# EAGLE board electronic_eye2 (EAGLE 6.5.0)
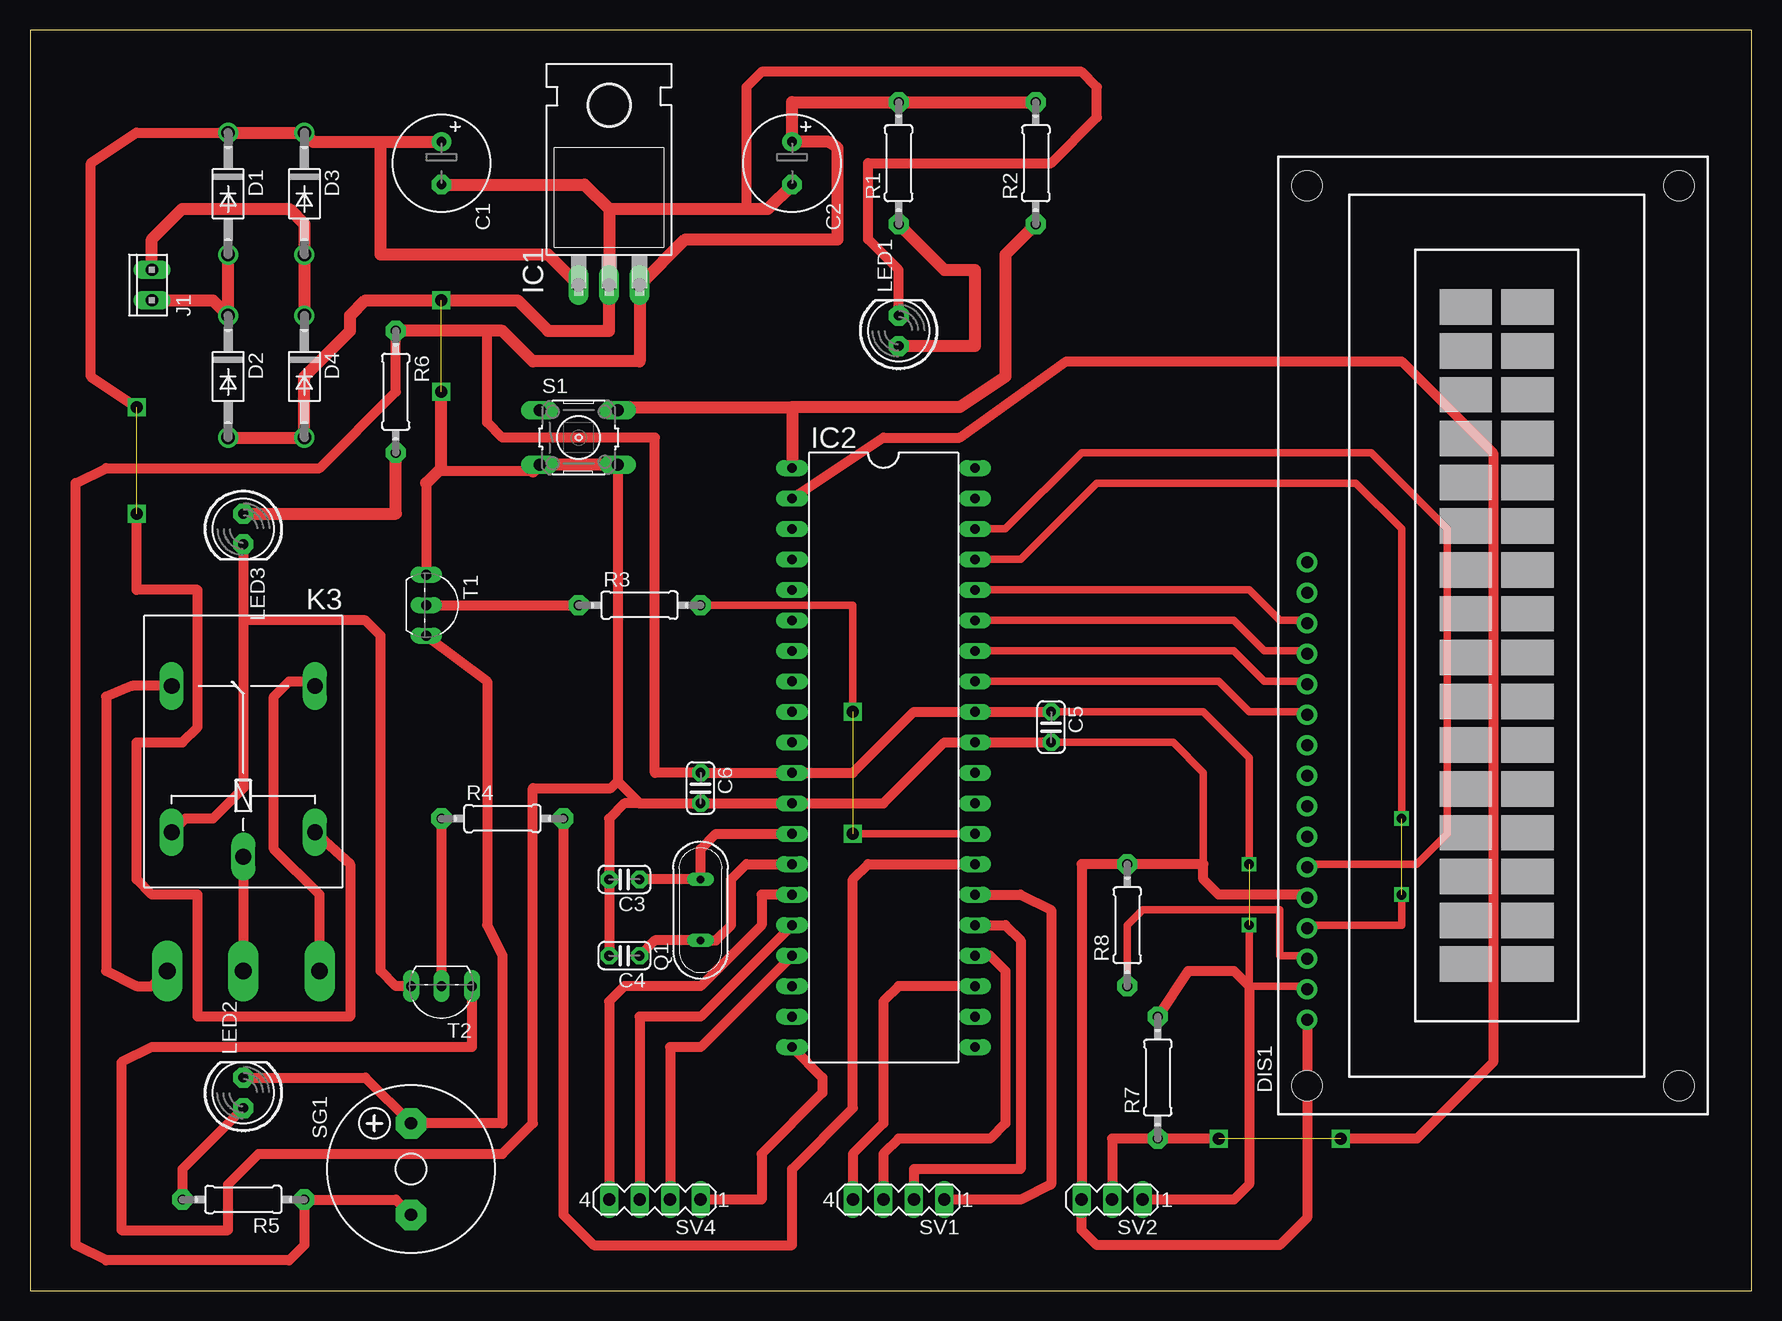
[diagram p0: board, top side]

Size 143.49 x 105.08 mm. Coordinates in mm from the lower left corner, seen from the top.
Outline: 0,0 143.49,0 143.49,105.08 0,105.08 0,0
Copper layers (1*16): Top 0.035mm / dielectric 1.5mm / Bottom 0.035mm
Design rules "default": minimum track width 10mil, minimum drill 24mil, track to track 8mil, track to pad 8mil, pad to pad 8mil, via to via 8mil, smd to smd 8mil, copper to edge 40mil, drill to drill 8mil, minimum pad ring 10mil, minimum via ring 8mil, stop-mask expansion 4mil, vias tented up to drill 0mil, thermal gap 10mil

## Footprints (pad centres in the part's own frame; a part is rotated, then mirrored left to right if it is on the bottom)
E3,5-8 = drill 0.813 pad 1.6: + -1.778,0 | drill 0.813 pad 1.6 octagon: - 1.778,0
C025-024X044 = drill 0.813 pad 1.422 octagon: 1 -1.27,0; 2 1.27,0
DO41-10 = drill 1.118: A 5.08,0; C -5.08,0
TUXGR_16X2_R2 = drill 1 pad 1.676: 1 -32,15.5; 2 -29.46,15.5; 3 -26.92,15.5; 4 -24.38,15.5; 5 -21.84,15.5; 6 -19.3,15.5; 7 -16.76,15.5; 8 -14.22,15.5; 9 -11.68,15.5; 10 -9.14,15.5; 11 -6.6,15.5; 12 -4.06,15.5; 13 -1.52,15.5; 14 1.02,15.5; 15 3.56,15.5; 16 6.1,15.5 | hole 2.5: -37.5,-15.5; 37.5,-15.5; -37.5,15.5; 37.5,15.5
TO220H = drill 1.118 long: 1 -2.54,-10.16; 2 0,-10.16; 3 2.54,-10.16 | hole 3.302: 0,4.826
DIL40 = drill 0.813 long: 1 -24.13,-7.62; 2 -21.59,-7.62; 3 -19.05,-7.62; 4 -16.51,-7.62; 5 -13.97,-7.62; 6 -11.43,-7.62; 7 -8.89,-7.62; 8 -6.35,-7.62; 9 -3.81,-7.62; 10 -1.27,-7.62; 11 1.27,-7.62; 12 3.81,-7.62; 13 6.35,-7.62; 14 8.89,-7.62; 15 11.43,-7.62; 16 13.97,-7.62; 17 16.51,-7.62; 18 19.05,-7.62; 19 21.59,-7.62; 20 24.13,-7.62; 21 24.13,7.62; 22 21.59,7.62; 23 19.05,7.62; 24 16.51,7.62; 25 13.97,7.62; 26 11.43,7.62; 27 8.89,7.62; 28 6.35,7.62; 29 3.81,7.62; 30 1.27,7.62; 31 -1.27,7.62; 32 -3.81,7.62; 33 -6.35,7.62; 34 -8.89,7.62; 35 -11.43,7.62; 36 -13.97,7.62; 37 -16.51,7.62; 38 -19.05,7.62; 39 -21.59,7.62; 40 -24.13,7.62
10X02MTA = drill 1.016 long: 1 1.27,0; 2 -1.27,0
1X1-BIGPOGO = drill 1.4 pad 2.54 long: P$1 0,0
G5LE = drill 1.321 long: 1 -7.493,-5.969; 2 -7.493,5.969; O 4.699,5.969; P -9.525,0; S 4.699,-5.969
LED5MM = drill 0.813 pad 1.676 octagon: A -1.27,0; K 1.27,0
QS = drill 0.61 long: 1 -2.54,0; 2 2.54,0
0207/10 = drill 0.813 pad 1.676 octagon: 1 -5.08,0; 2 5.08,0
B3F-10XX = drill 1.016 long: 1 -3.251,2.261; 2 3.251,2.261; 3 -3.251,-2.261; 4 3.251,-2.261
F/CM12P = drill 1.016 pad 2.54 octagon: + 3.81,0; - -3.81,0
MA04-1 = drill 1.016 long: 1 -3.81,0; 2 -1.27,0; 3 1.27,0; 4 3.81,0
MA03-1 = drill 1.016 long: 1 -2.54,0; 2 0,0; 3 2.54,0
TO92-EBC-OVAL = drill 0.813 long: B 0,-1.27; C 2.54,-1.27; E -2.54,-1.27

## Placement (x,y rotation side)
C1  [E3,5-8]  34.29,93.98 270 top
C2  [E3,5-8]  63.5,93.98 270 top
C3  [C025-024X044]  49.53,34.29 180 top
C4  [C025-024X044]  49.53,27.94 180 top
C5  [C025-024X044]  85.09,46.99 270 top
C6  [C025-024X044]  55.88,41.91 270 top
D1  1N4004  [DO41-10]  16.51,91.44 270 top
D2  1N4004  [DO41-10]  16.51,76.2 270 top
D3  1N4004  [DO41-10]  22.86,91.44 270 top
D4  1N4004  [DO41-10]  22.86,76.2 270 top
DIS1  TUXGR_16X2_R2  [TUXGR_16X2_R2]  121.92,54.61 90 top
IC1  7805T  [TO220H]  48.26,93.98 0 top
IC2  PIC18F4550_40  [DIL40]  71.12,44.45 270 top
J1  [10X02MTA]  10.16,83.82 90 top
JP2  [1X1-BIGPOGO]  11.43,26.67 90 top
JP3  [1X1-BIGPOGO]  24.13,26.67 90 top
JP4  [1X1-BIGPOGO]  17.78,26.67 90 top
K3  G5L  [G5LE]  17.78,45.72 90 top
LED1  [LED5MM]  72.39,80.01 90 top
LED2  [LED5MM]  17.78,16.51 90 top
LED3  [LED5MM]  17.78,63.5 270 top
Q1  [QS]  55.88,31.75 90 top
R1  [0207/10]  72.39,93.98 90 top
R2  10k  [0207/10]  83.82,93.98 90 top
R3  10k  [0207/10]  50.8,57.15 0 top
R4  10k  [0207/10]  39.37,39.37 0 top
R5  10k  [0207/10]  17.78,7.62 180 top
R6  10k  [0207/10]  30.48,74.93 270 top
R7  10k  [0207/10]  93.98,17.78 90 top
R8  10k  [0207/10]  91.44,30.48 90 top
S1  [B3F-10XX]  45.72,71.12 0 top
SG1  F/CM12P  [F/CM12P]  31.75,10.16 90 top
SV1  [MA04-1]  72.39,7.62 180 top
SV2  [MA03-1]  90.17,7.62 180 top
SV4  [MA04-1]  52.07,7.62 180 top
T1  2N2222  [TO92-EBC-OVAL]  34.29,57.15 270 top
T2  2N2222  [TO92-EBC-OVAL]  34.29,24.13 180 top

## Library data of the parts
C1-C6 IC1 JP2-JP4 LED1-LED3 R1-R8 T1 T2 = adafruit
D1-D4 = diode
DIS1 = display-lcd; OC_FARNELL: unknown; OC_NEWARK: unknown
IC2 = microchip; MF: MICROCHIP; MPN: PIC18F4550-I/P; OC_FARNELL: 9321357; OC_NEWARK: 74K8623
J1 = con-amp
K3 = relay; OC_FARNELL: unknown; OC_NEWARK: unknown
Q1 = special
S1 = switch-omron; MPN: B3F-1000; OC_FARNELL: 176432; OC_NEWARK: 36M3542
SG1 = buzzer; OC_FARNELL: unknown; OC_NEWARK: unknown
SV1 SV2 SV4 = con-lstb; OC_FARNELL: unknown; OC_NEWARK: unknown

## Nets
+5V: C2.+ C5.1 C6.1 DIS1.2 IC1.3 IC2.11 IC2.32 R1.2 R2.2 R5.1 R6.1 R7.2 SG1.- SV2.1
+12V: C1.+ D1.C D3.C IC1.1 K3.1
GND: C1.- C2.- C3.2 C4.2 C5.2 C6.2 D2.A D4.A DIS1.1 DIS1.5 IC1.2 IC2.12 IC2.31 LED1.K R8.2 S1.3 S1.4 SV2.3 T1.E T2.E
N$1: IC2.2 R7.1 SV2.2
N$2: D1.A D2.C J1.2
N$3: D3.A D4.C J1.1
N$4: C4.1 IC2.14 Q1.1
N$5: C3.1 IC2.13 Q1.2
N$6: LED1.A R1.1
N$7: LED2.A R5.2
N$8: DIS1.11 IC2.33
N$9: IC2.15 SV4.4
N$10: R3.1 T1.B
N$11: IC2.1 R2.1 S1.2
N$12: R4.1 T2.B
N$13: DIS1.6 IC2.38
N$14: DIS1.4 IC2.37
N$15: LED2.K SG1.+ T1.C
N$16: K3.2 LED3.K T2.C
N$17: LED3.A R6.2
N$18: JP4.P$1 K3.P
N$19: JP2.P$1 K3.O
N$20: JP3.P$1 K3.S
N$21: IC2.16 SV4.3
N$22: IC2.25 SV1.2
N$23: IC2.26 SV1.1
N$24: IC2.17 SV4.2
N$25: IC2.20 SV4.1
N$26: DIS1.14 IC2.36
N$27: DIS1.13 IC2.35
N$28: DIS1.12 IC2.34
N$30: DIS1.3 R8.1
N$38: IC2.23 SV1.4
N$39: IC2.27 R4.2
N$40: IC2.28 R3.2
N$41: IC2.24 SV1.3

## Tracks (layer width: path | path; a pad name or v marks a point on that pad's centre or on a via)
+5V  (via drill 0.8)  (1 unrouted)
  Top 0.61: C5.1 97.79,48.26 101.6,44.45 v101.6,35.56 | v101.6,30.48 101.6,25.4 106.17,25.4 DIS1.2
  Top 0.813: C5.1 IC2.32 73.66,48.26 68.58,43.18 IC2.11 C6.1 52.07,43.18 52.07,71.12 39.37,71.12 38.1,72.39 38.1,80.01 | SV2.1 100.33,7.62 101.6,8.89 101.6,25.4 100.33,26.67 96.52,26.67 R7.2 | R6.1 30.48,74.93 24.13,68.58 6.35,68.58 3.81,67.31 3.81,3.81 6.35,2.54 21.59,2.54 22.86,3.81 R5.1 30.48,7.62 SG1.-
  Top 1.016: R2.2 R1.2 63.5,99.06 C2.+ 66.55,95.76 67.31,95.25 67.31,87.63 54.61,87.63 IC1.3 50.8,77.47 41.91,77.47 39.37,80.01 38.1,80.01 R6.1
+12V  (via drill 1)  (1 unrouted)
  Top 0.813: K3.1 26.67,35.56 26.67,22.86 13.97,22.86 13.97,33.02 10.16,33.02 8.89,34.29 8.89,45.72 12.7,45.72 13.97,46.99 13.97,58.42 8.89,58.42 v8.89,64.77 | v8.89,73.66 5.08,76.2 5.08,93.98 8.89,96.52 D1.C
  Top 1.016: D1.C D3.C 23.62,95.76 29.21,95.76 | 29.21,95.76 C1.+ | IC1.1 43.18,86.36 29.21,86.36 29.21,95.76
GND  (via drill 1)  (1 unrouted)
  Top 0.61: C5.2 95.25,45.72 97.79,43.18 97.79,35.56 | 99.06,33.02 106.17,33.02 DIS1.5
  Top 0.813: C5.2 IC2.31 76.2,45.72 71.12,40.64 IC2.12 C6.2 50.8,40.64 | 41.91,68.3 34.01,68.3 33.02,67.31 T1.E | S1.4 48.97,42.47 | 48.97,42.47 50.8,40.64 | DIS1.5 106.68,33.02 99.06,33.02 97.79,34.29 97.79,35.56 R8.2 87.63,35.56 SV2.3 87.63,5.08 88.9,3.81 104.14,3.81 106.42,6.09 DIS1.1 | 50.8,40.64 49.53,40.64 48.26,39.37 C3.2 C4.2 | LED1.K 72.39,85.09 69.85,87.63 69.85,93.98 85.09,93.98 88.9,97.79 88.9,100.33 87.63,101.6 60.96,101.6 59.69,100.33 59.69,90.17 | T2.E 36.83,20.32 10.16,20.32 7.62,19.05 7.62,5.08 16.51,5.08 16.51,8.89 19.05,11.43 39.37,11.43 41.91,13.97 41.91,41.91 48.41,41.91 48.97,42.47
  Top 1.016: D2.A D4.A 22.86,76.2 26.67,80.01 26.67,81.28 27.94,82.55 v34.29,82.55 40.64,82.55 43.18,80.01 48.26,80.01 IC1.2 48.26,90.17 | C1.- 46.23,92.2 48.26,90.17 | 48.26,90.17 59.69,90.17 61.47,90.17 C2.- | S1.4 S1.3 41.91,68.3 | 33.02,67.31 34.29,68.58 v34.29,74.93
N$1  (via drill 1)  (1 unrouted)
  Top 0.813: SV2.2 90.17,12.7 R7.1 v99.06,12.7 | IC2.2 71.12,71.12 77.47,71.12 86.36,77.47 114.3,77.47 121.92,69.85 121.92,19.05 115.57,12.7 v109.22,12.7
N$2
  Top 1.016: J1.2 15.24,82.55 D2.C D1.A
N$3
  Top 1.016: J1.1 10.16,87.63 12.7,90.17 21.59,90.17 22.86,88.9 D3.A D4.C
N$4
  Top 0.813: IC2.14 59.69,35.56 58.42,34.29 58.42,30.48 57.15,29.21 Q1.1 52.07,29.21 C4.1
N$5
  Top 0.813: IC2.13 57.15,38.1 55.88,36.83 Q1.2 C3.1
N$6
  Top 1.016: R1.1 76.2,85.09 78.74,85.09 78.74,78.74 LED1.A
N$7
  Top 0.813: LED2.A 12.7,10.16 R5.2
N$8
  Top 0.61: IC2.33 99.06,50.8 101.6,48.26 106.17,48.26 DIS1.11
N$9
  Top 0.813: IC2.15 60.96,33.02 60.96,30.48 55.88,25.4 49.53,25.4 48.26,24.13 SV4.4
N$10
  Top 0.813: T1.B R3.1
N$11
  Top 1.016: R2.1 81.28,86.36 81.28,76.2 77.47,73.66 63.5,73.66 | 63.5,73.66 IC2.1 | S1.2 49.96,73.66 63.5,73.66
N$12
  Top 0.813: R4.1 T2.B
N$13
  Top 0.61: IC2.38 81.28,63.5 87.63,69.85 111.76,69.85 118.11,63.5 118.11,38.1 115.57,35.56 106.67,35.56 DIS1.6
N$14  (via drill 0.8)  (1 unrouted)
  Top 0.61: IC2.37 82.55,60.96 88.9,67.31 110.49,67.31 114.3,63.5 v114.3,39.37 | v114.3,33.02 114.3,30.48 106.67,30.48 DIS1.4
N$15
  Top 0.813: T1.C 38.1,50.8 38.1,30.48 39.37,27.94 39.37,13.97 SG1.+ 27.94,17.78 LED2.K
N$16
  Top 0.813: LED3.K 17.78,55.88 | 17.78,55.88 17.78,41.91 15.24,39.37 12.95,39.37 K3.2 | T2.C 30.48,25.4 29.21,26.67 29.21,54.61 27.94,55.88 17.78,55.88
N$17
  Top 1.016: LED3.A 30.48,64.77 R6.2
N$18
  Top 0.813: K3.P JP4.P$1
N$19
  Top 0.813: K3.O 8.51,50.42 6.35,49.53 6.35,26.67 8.89,25.4 10.16,25.4 JP2.P$1
N$20
  Top 0.813: JP3.P$1 24.13,33.02 20.32,36.83 20.32,49.53 21.59,50.8 23.37,50.8 K3.S
N$21
  Top 0.813: IC2.16 55.88,22.86 50.8,22.86 SV4.3
N$22
  Top 0.813: IC2.25 81.28,30.48 82.55,29.21 82.55,10.16 73.66,10.16 SV1.2
N$23
  Top 0.813: IC2.26 82.55,33.02 85.09,31.75 85.09,8.89 82.55,7.62 SV1.1
N$24
  Top 0.813: IC2.17 55.88,20.32 53.34,20.32 SV4.2
N$25
  Top 0.813: IC2.20 66.04,17.78 66.04,16.51 60.96,11.43 60.96,7.62 SV4.1
N$26
  Top 0.61: IC2.36 101.6,58.42 104.14,55.88 106.17,55.88 DIS1.14
N$27
  Top 0.61: IC2.35 100.33,55.88 102.87,53.34 106.17,53.34 DIS1.13
N$28
  Top 0.61: IC2.34 100.33,53.34 102.87,50.8 106.17,50.8 DIS1.12
N$30
  Top 0.61: R8.1 91.44,30.48 92.71,31.75 104.14,31.75 104.14,27.94 106.17,27.94 DIS1.3
N$38
  Top 0.813: IC2.23 72.39,25.4 71.12,24.13 71.12,13.97 68.58,11.43 SV1.4
N$39
  Top 0.813: R4.2 44.45,6.35 46.99,3.81 63.5,3.81 63.5,10.16 68.58,15.24 68.58,34.29 69.85,35.56 IC2.27
N$40  (via drill 1)  (1 unrouted)
  Top 0.61: R3.2 68.58,57.15 v68.58,48.26 | v68.58,38.1 IC2.28
N$41
  Top 0.813: IC2.24 80.01,27.94 81.28,26.67 81.28,13.97 80.01,12.7 72.39,12.7 71.12,11.43 SV1.3